# EAGLE board PCE_RGBAMP (EAGLE 6.5.0)
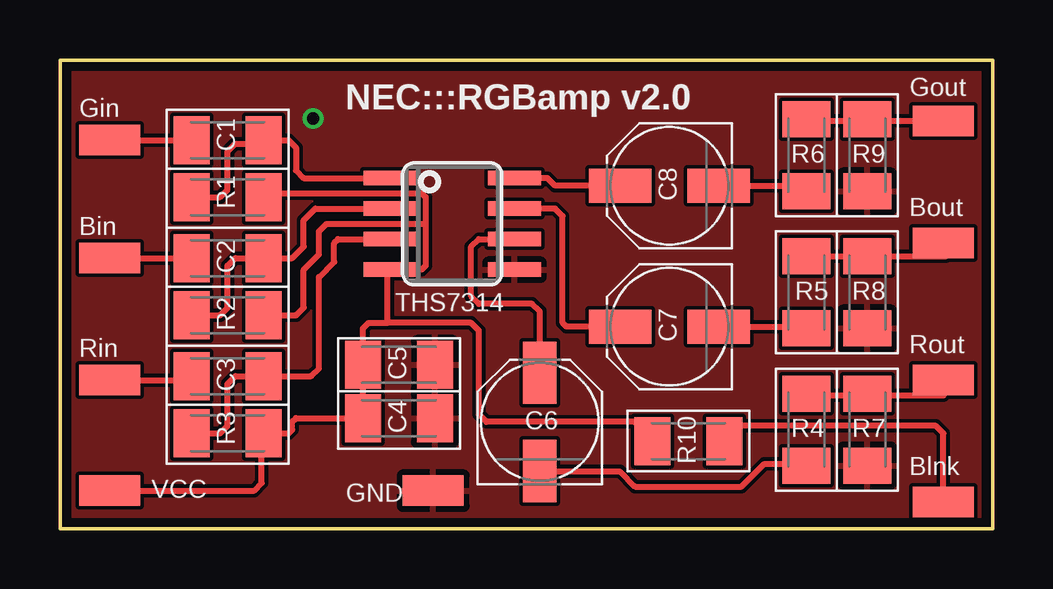
[diagram p0: board, top side]
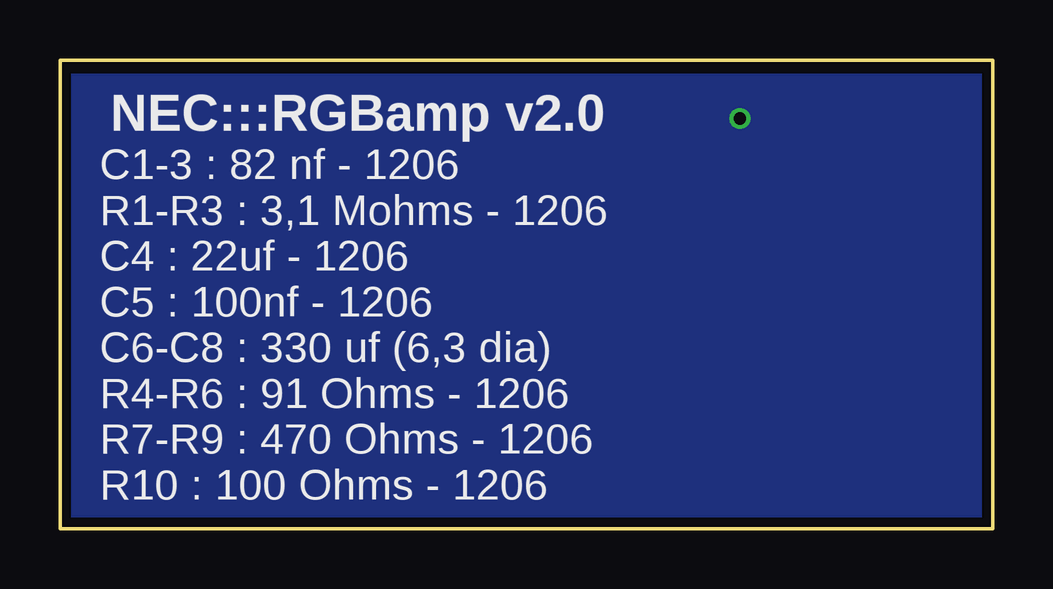
[diagram p1: board, bottom side, seen from below]

Size 38.89 x 19.53 mm. Coordinates in mm from the lower left corner, seen from the top.
Outline: 0,19.53 0,0 38.89,0 38.89,19.53 0,19.53
Copper layers (1*16): Top 0.0356mm / dielectric 1.5011mm / Bottom 0.0356mm
Design rules "hucard_pcb": minimum track width 6mil, minimum drill 13mil, track to track 6mil, track to pad 6mil, pad to pad 6mil, via to via 6mil, smd to smd 6mil, copper to edge 15mil, drill to drill 6mil, minimum pad ring 7mil, minimum via ring 7mil, stop-mask expansion 3mil, vias tented up to drill 13mil, thermal gap 10mil

## Footprints (pad centres in the part's own frame; a part is rotated, then mirrored left to right if it is on the bottom)
SO08 = smd 0.6 x 2.2: 1 -1.905,-2.6; 2 -0.635,-2.6; 3 0.635,-2.6; 4 1.905,-2.6; 5 1.905,2.6; 6 0.635,2.6; 7 -0.635,2.6; 8 -1.905,2.6
SMD1,27-2,54 = smd 1.27 x 2.54: 1 0,0
PANASONIC_C = smd 2.6 x 1.4: + 2.05,0; - -2.05,0
C1206K = smd 1.5 x 2: 1 -1.5,0; 2 1.5,0

## Placement (x,y rotation side)
7314  UPB1505  [SO08]  16.35,12.7 270 top
BI  [SMD1,27-2,54]  2.06,11.27 270 top
BO  [SMD1,27-2,54]  36.83,11.91 270 top
C1  [PANASONIC_C]  25.4,8.41 180 top
C2  [PANASONIC_C]  20,4.45 90 top
C3  [PANASONIC_C]  25.4,14.29 180 top
C4  [C1206K]  14.13,6.83 180 top
C5  [C1206K]  14.13,4.6 180 top
C6  [C1206K]  6.99,16.19 0 top
C7  [C1206K]  6.98,6.35 180 top
C8  [C1206K]  6.99,11.27 0 top
COM  [SMD1,27-2,54]  36.83,1.11 90 top
GI  [SMD1,27-2,54]  2.06,16.19 270 top
GND  [SMD1,27-2,54]  15.56,1.59 270 top
GO  [SMD1,27-2,54]  36.83,16.99 90 top
R1  [C1206K]  6.99,13.81 0 top
R2  [C1206K]  6.98,8.89 0 top
R3  [C1206K]  6.98,3.97 180 top
R4  [C1206K]  31.11,4.13 90 top
R5  [C1206K]  31.12,15.56 90 top
R6  [C1206K]  31.12,9.84 270 top
R7  [C1206K]  33.66,15.56 270 top
R8  [C1206K]  33.66,4.13 270 top
R9  [C1206K]  33.66,9.84 270 top
R10  [C1206K]  26.19,3.65 180 top
RI  [SMD1,27-2,54]  2.06,6.19 270 top
RO  [SMD1,27-2,54]  36.83,6.19 270 top
VCC  [SMD1,27-2,54]  2.06,1.59 90 top

## Library data of the parts
7314 = nec; OC_FARNELL: unknown; OC_NEWARK: unknown
BI BO COM GI GND GO RI RO VCC = wirepad
C1-C8 R1-R10 = resistor

## Nets
GND: 7314.5 C4.1 C5.1 GND.1 R7.2 R8.2 R9.2
N$1: 7314.8 C3.+
N$2: C3.- R5.1
N$3: GO.1 R5.2 R7.1
N$4: R4.2 R8.1 RO.1
N$5: C2.- R4.1
N$6: 7314.6 C2.+
N$7: 7314.7 C1.+
N$8: C1.- R6.2
N$9: BO.1 R6.1 R9.1
N$10: COM.1 R10.1
N$12: 7314.2 C8.2 R2.1
N$13: BI.1 C8.1
N$14: C7.2 RI.1
N$15: 7314.3 C7.1 R3.2
N$16: 7314.1 C6.2 R1.1
N$17: C6.1 GI.1
VCC: 7314.4 C4.2 C5.2 R1.2 R2.2 R3.1 R10.2 VCC.1

## Tracks (layer width: path | path; a pad name or v marks a point on that pad's centre or on a via)
GND  (via drill 0.51)
  other vias: 10.55,17.09
  pour Top: -0.32,19.68 -0.32,-0.16 39.21,-0.16 39.21,19.68
  pour Bottom: -0.32,18.89 -0.32,-0.16 39.05,-0.16 39.05,18.89
N$1
  Top 0.254: C3.+ 20.64,14.29 20.32,14.61 7314.8
N$2
  Top 0.254: C3.- 30.88,14.29 R5.1
N$3
  Top 0.254: R5.2 31.12,16.99 33.66,16.99 | R7.1 33.66,16.99 | 33.66,16.99 GO.1
N$4
  Top 0.254: R4.2 31.11,5.56 31.27,5.56 33.66,5.56 | 33.66,5.56 36.83,5.56 RO.1 | 33.66,5.56 R8.1
N$5
  Top 0.254: C2.- 20.16,2.4 | 20.16,2.4 20.48,2.7 | 20.16,2.4 23.34,2.38 23.97,1.75 28.42,1.75 29.37,2.7 30.48,2.7 31.03,2.71 R4.1
N$6
  Top 0.254: C2.+ 20,9.05 19.69,9.37 17.46,9.37 17.14,9.68 17.14,11.75 17.46,12.07 7314.6
N$7
  Top 0.254: C1.+ 22.07,8.41 | 22.23,8.57 22.07,8.41 | 22.07,8.41 21.11,8.41 20.96,8.57 20.96,13.02 20.64,13.34 7314.7
N$8
  Top 0.254: C1.- 31.04,8.41 R6.2
N$9
  Top 0.254: R6.1 R9.1 36.92,11.34 BO.1
N$10
  Top 0.254: COM.1 36.83,3.97 36.51,4.29 28.1,4.29 27.53,3.72 R10.1
N$12
  Top 0.254: R2.1 6.67,8.89 6.98,9.21 6.98,10.95 7.3,11.27 C8.2 9.68,11.27 10.16,11.75 10.16,12.86 10.64,13.34 7314.2
N$13
  Top 0.254: BI.1 C8.1 | C8.1
N$14
  Top 0.254: RI.1 5.48,6.19 C7.2
N$15
  Top 0.254: R3.2 6.67,3.97 6.98,4.29 6.98,6.03 7.3,6.35 C7.1 | C7.1 | C7.1 10.48,6.35 10.79,6.67 10.79,10.48 11.43,11.11 11.43,11.91 11.59,12.07 7314.3
N$16
  Top 0.254: R1.1 6.67,13.81 6.98,14.13 6.98,15.72 7.3,16.03 8.33,16.03 C6.2 9.53,16.19 9.84,15.88 9.84,14.92 10.16,14.61 7314.1
N$17
  Top 0.254: GI.1 C6.1 | C6.1
VCC
  Top 0.254: 13.65,8.57 12.86,8.57 12.63,8.34 C4.2 C5.2 9.84,4.6 9.68,4.45 9.68,4.13 9.53,3.97 R3.1 8.41,3.9 8.41,1.91 8.1,1.59 VCC.1 | 13.65,8.57 13.65,10.7 7314.4 15.08,10.8 15.24,10.95 15.24,12.7 | R1.2 9.05,13.97 15.08,13.97 15.24,13.81 15.24,12.7 | R2.2 9.84,8.89 10.16,9.21 10.16,10.8 10.79,11.43 10.79,12.38 11.11,12.7 15.24,12.7 | R10.2 24.53,3.72 23.97,4.45 17.78,4.45 17.46,4.76 17.46,8.26 17.14,8.57 13.65,8.57

## Text on the board
tPlace: Gout | Gin | NEC:::RGBamp v2.0 | C1 | R6 | R9 | R1 | C8 | Bout | Bin | C2 | THS7314 | R5 | R8 | R2 | Rin | C7 | Rout | C5 | C3 | C6 | R3 | C4 | R4 | R7 | R10 | Blnk | VCC | GND
bPlace: NEC:::RGBamp v2.0 | C1-3 : 82 nf - 1206 / R1-R3 : 3,1 Mohms - 1206 / C4 : 22uf - 1206 / C5 : 100nf - 1206 / C6-C8 : 330 uf (6,3 dia) / R4-R6 : 91 Ohms - 1206 / R7-R9 : 470 Ohms - 1206 / R10 : 100 Ohms - 1206